# Altium PCB Peak Detector.PcbDoc
Units mm, origin at the board's own origin, x right, y up, seen from the top; angles counter-clockwise.
Board outline 80 x 50 mm, 2 copper layers (Top Layer, Bottom Layer); 59 components, 30 nets, 182 pads, 9 vias.
Unrouted connection lines stored in the file: 15.
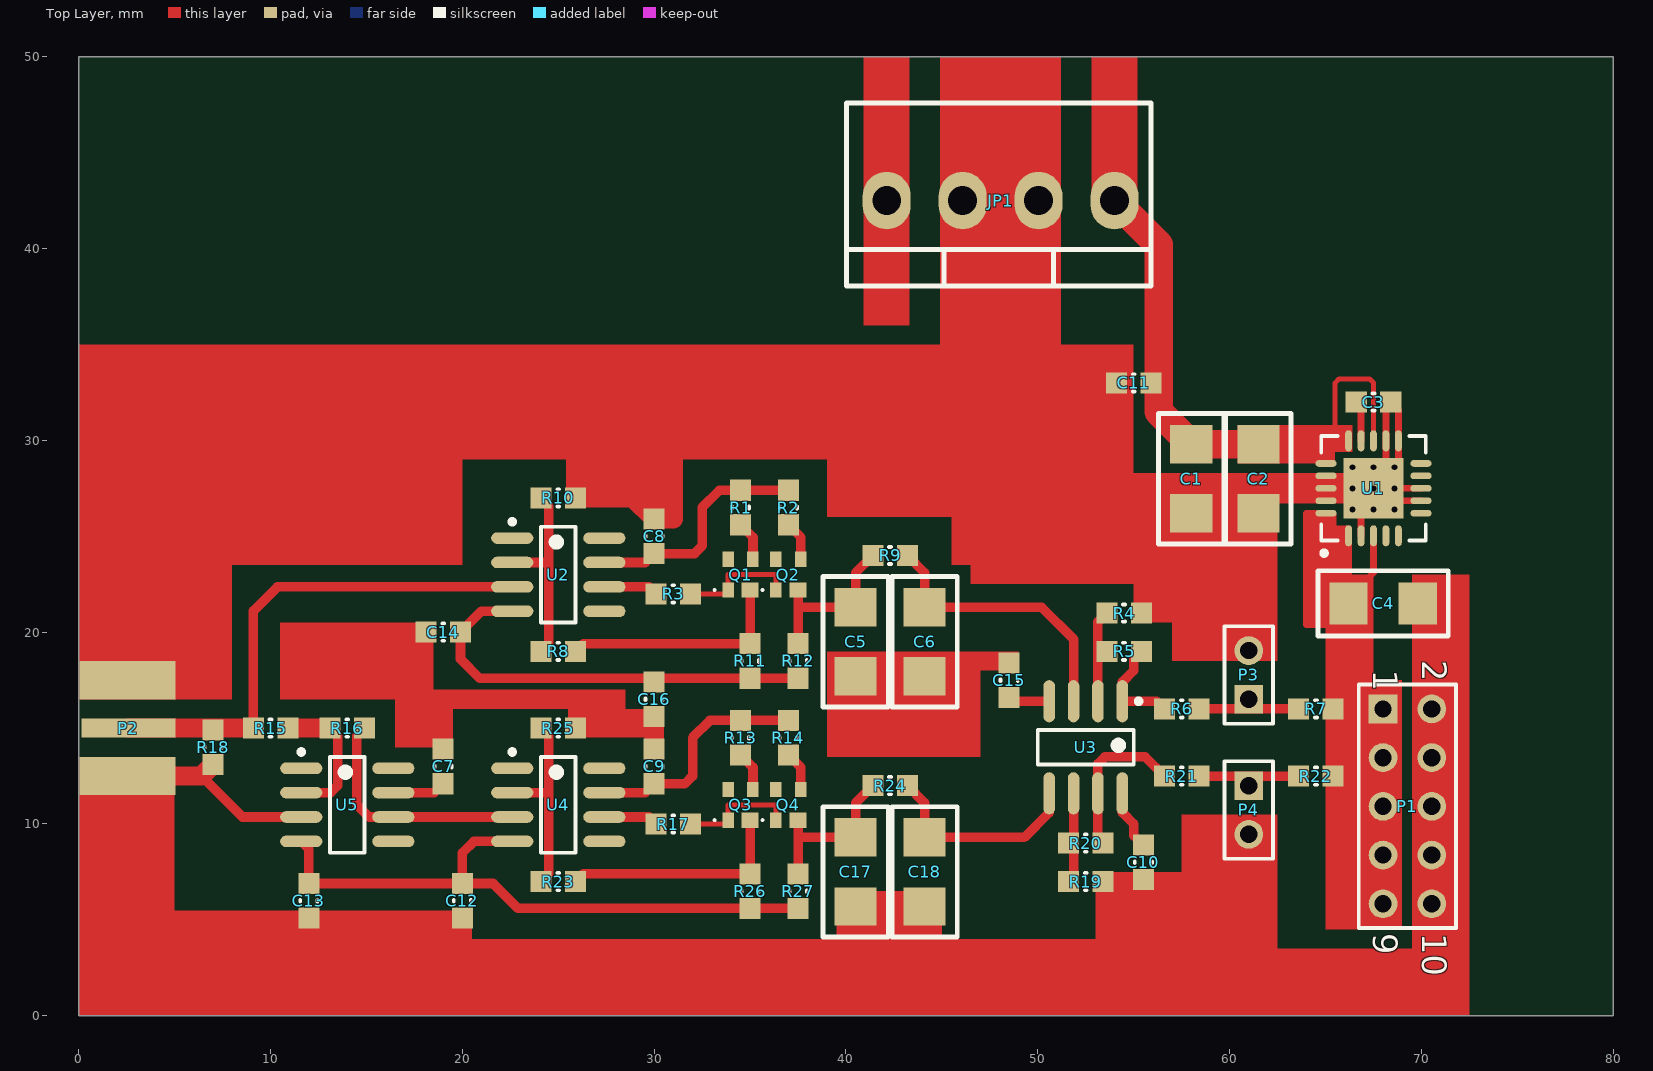
[diagram p0: Top Layer view]
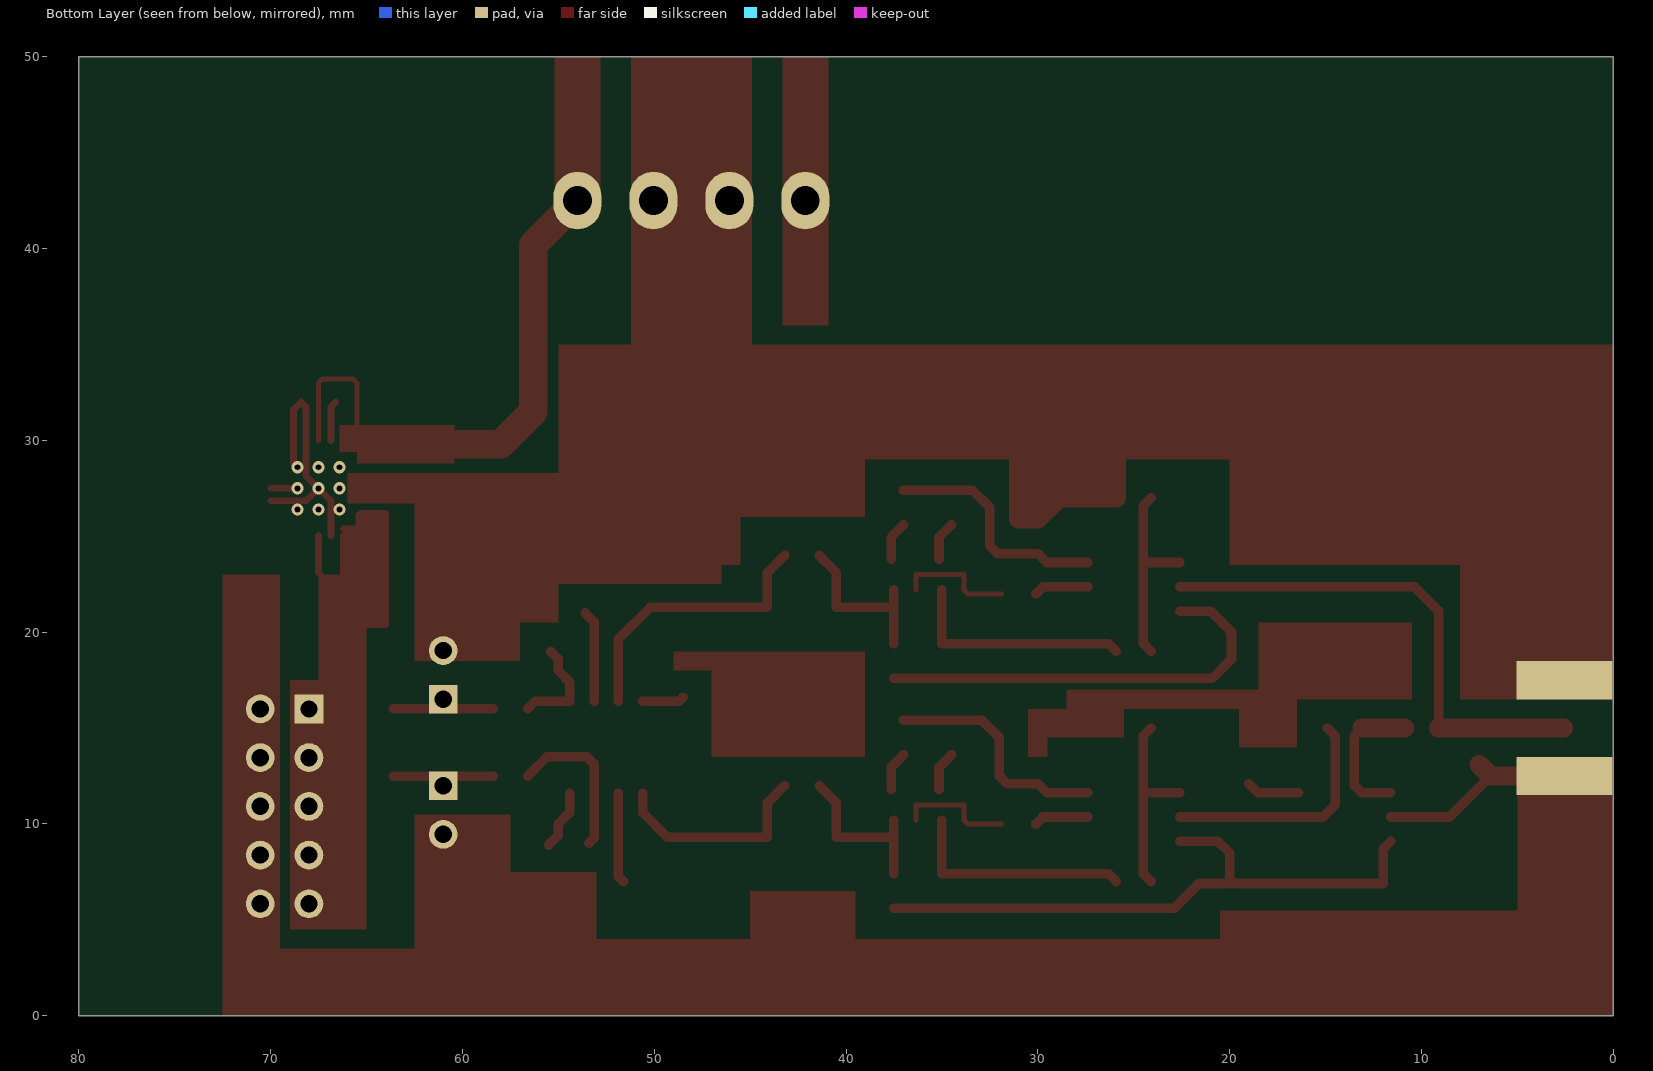
[diagram p1: Bottom Layer view, seen from below]

## Layer stack, top to bottom
Top Solder: solder mask 0.0102, Solder Resist, Dk 3.5
Top Layer: signal copper 0.0356
Dielectric 1: dielectric 0.32, FR-4, Dk 4.8
Bottom Layer: signal copper 0.0356
Bottom Solder: solder mask 0.0102, Solder Resist, Dk 3.5

## Board outline
0,0 80,0 80,50 0,50

## Design rules (kind name [scope] priority, off if disabled: settings)
Clearance [All] p1: gap=0.152
HoleSize [All] p1: absolutevalues=TRUE maxlimit=2539.975 minlimit=0.305 maxpercent=80.000 minpercent=20.000
PolygonConnect [All] p1: connectstyle=Relief reliefconductorwidth=0.254 reliefentries=4 polygonreliefangle="90 Angle" airgapwidth=0.254
RoutingVias [All] p1: holewidth=0.711 width=1.27 viastyle="Through Hole" minholewidth=0.305 minwidth=0.635 maxholewidth=711.2 maxwidth=1270
SolderMaskExpansion [All] p1: expansion=0.102
Width [All] p1: maxlimit=254 minlimit=0.254 preferedwidth=0.254
29 further rules are at their usual default settings.

## Components (designator, comment, footprint, x,y, rotation, side; value= is the part's Value field where it differs from the comment)
C1 "100uF" CAPC3225 58,28 r90 top
C2 "100uF" CAPC3225 61.5,28 r90 top
C3 "100nF" CAPC0603(1608)55_M 67.5,32 r180 top
C4 "100uF" CAPC3225 68,21.5 r180 top
C5 "100uF" CAPC3225 40.5,19.5 r90 top
C6 "100uF" CAPC3225 44.1,19.5 r90 top
C7 "100nF" CAPC0603(1608)55_M 19,13 r270 top
C8 "100nF" CAPC0603(1608)55_M 30,25 r270 top
C9 "100nF" CAPC0603(1608)55_M 30,13 r270 top
C10 "100nF" CAPC0603(1608)55_M 55.5,8 r90 top
C11 "100nF" CAPC0603(1608)55_M 55,33 r0 top
C12 "100nF" CAPC0603(1608)55_M 20,6 r90 top
C13 "100nF" CAPC0603(1608)55_M 12,6 r90 top
C14 "100nF" CAPC0603(1608)55_M 19,20 r0 top
C15 "100nF" CAPC0603(1608)55_M 48.5,17.5 r270 top
C16 "100nF" CAPC0603(1608)55_M 30,16.5 r90 top
C17 "100uF" CAPC3225 40.5,7.5 r90 top
C18 "100uF" CAPC3225 44.1,7.5 r90 top
JP1 "Header 4" 3.96-4 54,42.5 r180 top
P1 "Header 5X2" HDR2X5 68,16 r270 top
P2 "SMA" SMA-V 0,15 r0 top
P3 "Header 2" HDR1X2 61,16.5 r90 top
P4 "Header 2" HDR1X2 61,12 r270 top
Q1 "BFP420" SOT343 34.5,23 r90 top
Q2 "BFP420" SOT343 37,23 r90 top
Q3 "BFP420" SOT343 34.5,11 r90 top
Q4 "BFP420" SOT343 37,11 r90 top
R1 "4.7R" RESC0603(1608)_M 34.5,26.5 r90 top
R2 "4.7R" RESC0603(1608)_M 37,26.5 r90 top
R3 "4.7R" RESC0603(1608)_M 31,22 r180 top
R4 "1K" RESC0603(1608)_M 54.5,21 r0 top
R5 "1K" RESC0603(1608)_M 54.5,19 r180 top
R6 "1K" RESC0603(1608)_M 57.5,16 r180 top
R7 "1K" RESC0603(1608)_M 64.5,16 r180 top
R8 "1.8K" RESC0603(1608)_M 25,19 r180 top
R9 "100R" RESC0603(1608)_M 42.3,24 r180 top
R10 "NC" RESC0603(1608)_M 25,27 r0 top
R11 "820R" RESC0603(1608)_M 35,18.5 r90 top
R12 "820R" RESC0603(1608)_M 37.5,18.5 r90 top
R13 "4.7R" RESC0603(1608)_M 34.5,14.5 r90 top
R14 "4.7R" RESC0603(1608)_M 37,14.5 r90 top
R15 "560R" RESC0603(1608)_M 10,15 r180 top
R16 "560R" RESC0603(1608)_M 14,15 r180 top
R17 "4.7R" RESC0603(1608)_M 31,10 r180 top
R18 "56R" RESC0603(1608)_M 7,14 r270 top
R19 "1K" RESC0603(1608)_M 52.5,7 r0 top
R20 "1K" RESC0603(1608)_M 52.5,9 r180 top
R21 "1K" RESC0603(1608)_M 57.5,12.5 r180 top
R22 "1K" RESC0603(1608)_M 64.5,12.5 r180 top
R23 "1.8K" RESC0603(1608)_M 25,7 r180 top
R24 "100R" RESC0603(1608)_M 42.3,12 r180 top
R25 "NC" RESC0603(1608)_M 25,15 r0 top
R26 "820R" RESC0603(1608)_M 35,6.5 r90 top
R27 "820R" RESC0603(1608)_M 37.5,6.5 r90 top
U1 "TPS7A4701" QFN20 67.5,27.5 r90 top
U2 "THS3091D" SOIC8 25,23 r0 top
U3 "OPA2277" SOIC8 52.5,14 r270 top
U4 "THS3091D" SOIC8 25,11 r0 top
U5 "THS3091D" SOIC8 14,11 r0 top

## Footprints (in the part's own frame and the unit in brackets; to place one, negate y for a bottom-side part, rotate by r counter-clockwise, add the part's x,y. Pads: shape width x height; smd on the part's side, far side on the other; paste and mask are expansions set on the pad)
3.96-4 [mm]
  oval 2.5x3 hole 1.5: 1(0,0) 2(3.96,0) 3(7.92,0) 4(11.88,0)
  silkscreen extent -1.91,-5.08 13.97,4.45, body extent -1.9,-5.08 13.97,4.44, height 12
CAPC0603(1608)55_M [mm] "Chip Capacitor, Body 1.6x0.8mm, Height 0.55mm, IPC Low Density"
  rect 1.1x1.1 smd: 1(-0.9,0) 2(0.9,0)
  silkscreen extent -0.05,-0.45 0.05,0.45, body extent -0.87,-0.47 0.88,0.48, height 0.55
CAPC3225 [mm] "SMT Capacitor, 2 Leads, Body 3.5x2.8mm"
  rect 2x2.2 smd: 1(-1.8,0) 2(1.8,0)
  silkscreen extent -3.4,-1.7 3.4,1.7, body extent -1.6,-1.3 1.6,1.3, height 2.5
HDR1X2 [mm] "Connector; Header; 2 Position"
  rect 1.5x1.5 hole 0.9: 1(0,0)
  round 1.5 hole 0.9: 2(2.54,0)
  silkscreen extent -1.27,-1.27 3.81,1.27
HDR2X5 [mm] "Connector; Header; 5x2 Position"
  rect 1.5x1.5 hole 0.9: 1(0,0)
  round 1.5 hole 0.9: 2(0,2.54) 3(2.54,0) 4(2.54,2.54) 5(5.08,0) 6(5.08,2.54) 7(7.62,0) 8(7.62,2.54) 9(10.16,0) 10(10.16,2.54)
  silkscreen extent -1.27,-1.27 11.43,3.81
QFN20 [mm] "QFN, 20-Leads, Body 5.00x5.00mm, Pitch 0.65mm, Thermal Pad 3.15x3.15mm, IPC Medium Density"
  oval 1.1x0.35 smd: 1(-2.475,1.3) 2(-2.475,0.65) 3(-2.475,0) 4(-2.475,-0.65) 5(-2.475,-1.3) 11(2.475,-1.3) 12(2.475,-0.65) 13(2.475,0) 14(2.475,0.65) 15(2.475,1.3)
  oval 0.35x1.1 smd: 6(-1.3,-2.475) 7(-0.65,-2.475) 8(0,-2.475) 9(0.65,-2.475) 10(1.3,-2.475) 16(1.3,2.475) 17(0.65,2.475) 18(0,2.475) 19(-0.65,2.475) 20(-1.3,2.475)
  rect 3.15x3.15 smd: 21(0,0)
  silkscreen extent -3.5,-2.73 2.73,2.72, body extent -2.57,-2.58 2.58,2.57, height 1
RESC0603(1608)_M [mm] "Chip Resistor, Body 1.6x0.8mm, IPC Low Density"
  rect 1.1x1.1 smd: 1(-0.9,0) 2(0.9,0)
  silkscreen extent -0.05,-0.45 0.05,0.45, body extent -0.85,-0.47 0.85,0.47, height 0.6
SMA-V [mm]
  rect 4.9x1 smd: 1(2.6,0)
  rect 5x2 smd: 2(2.55,-2.5) 2(2.55,2.5)
  rect 5x2 smd far side: 2(2.55,-2.5) 2(2.55,2.5)
SOIC8 [mm] "SOIC, 8-Leads, Body 4.9x3.9mm, Pitch 1.27mm, IPC Medium Density"
  oval 2.2x0.6 smd: 1(-2.4,1.905) 2(-2.4,0.635) 3(-2.4,-0.635) 4(-2.4,-1.905) 5(2.4,-1.905) 6(2.4,-0.635) 7(2.4,0.635) 8(2.4,1.905)
  silkscreen extent -2.52,-2.5 0.9,2.88, body extent -2,-2.5 2,2.5, height 1.75
SOT343 [mm] "SOT343, 4-Leads, Body 2x1.25 mm"
  rect 0.8x0.6 smd: 1(-0.8,0.65) 3(0.8,-0.65) 4(0.8,0.65)
  rect 0.8x0.9 smd: 2(-0.8,-0.5)
  silkscreen extent -0.85,1.3 -0.75,1.4, body extent -0.63,-1 0.63,1, height 1

## Part data
C1 C2 C3 C4 C5 C6 C7 C8 C9 C10 C11 C12 C13 C14 C15 C16 C17 C18: library part CAP
JP1: "Header, 4-Pin"
P1: "Header, 5-Pin, Dual row"
P3 P4: "Header, 2-Pin"
R1 R2 R3 R4 R5 R6 R7 R8 R9 R10 R11 R12 R13 R14 R15 R16 R17 R18 R19 R20 R21 R22 R23 R24 R25 R26 R27: library part RES
U2 U4 U5: library part THS3201
U3: library part OP2

## Via types
v1: diameter 0.635, hole 0.305, Top Layer to Bottom Layer, 9 vias

## Nets (pads, with @x,y where several pads share a name; then routed paths per layer and width w, separated by ;. In a path a pad name is that pad's centre, name@x,y a point inside that pad or via, vN(x,y) a via of type N, cw(c..) or ccw(c..) an arc to the next point about the centre after c; other vN are vias at no path point)
+3.3V: C4.2 P1.1 P1.3 P1.5 P1.7 P1.9 R7.1 R22.1 U1.1 U1.3 U1.20 | length 15.7
  Top Layer w0.35: 65.1,20.4 64,20.4 64,26.2 U1.20 65.3,26.2 65.4,26.1 65.4,25.4 U1.1@66.2,25.4 ; C4.2 U1.1 ; 67.2,22.8 67.5,23.1 U1.3
+12V: C1.2 C2.2 C7.2 C8.2 C9.2 C10.2 C11.2 JP1.1 R1.2 R2.2 R13.2 R14.2 U1.13 U1.15 U1.16 U2.7 U3.8 U4.7 U5.7 | length 56.4
  Top Layer w0.254: 65.5,30.3 65.5,33 65.7,33.2 67.3,33.2 67.5,33 U1.13
  Top Layer w0.5: U5.7 18.535,11.635 C7.2 ; U4.7 29.535,11.635 C9.2 31.6,12.1 32,12.5 32,14.5 32.9,15.4 R13.2 R14.2 ; U2.7 29.535,23.635 C8.2 32.1,24.1 32.5,24.5 32.5,26.5 33.4,27.4 R1.2 R2.2 ; U3.8 54.405,10.595 55,10 55,9.4 C10.2
  Top Layer w1.5: JP1.1 56.3,40.2 56.3,31.5 C1.2 C2.2
-12V: C12.2 C13.2 C14.2 C15.2 C16.2 R11.1 R12.1 R26.1 R27.1 U2.4 U3.4 U4.4 U5.4 | length 57.3
  Top Layer w0.5: U5.4 12,8.695 C13.2 C12.2@19.7,6.9 ; U4.4 20.595,9.095 20,8.5 C12.2 21.6,6.9 22.9,5.6 R26.1 R27.1 ; U2.4 20.995,21.095 C14.2 19.9,18.6 20.9,17.6 R11.1 R12.1 ; C15.2 48.7,16.4 U3.4
GND: C1.1 C2.1 C3.1 C4.1 C5.1 C6.1 C7.1 C8.1 C9.1 C10.1 C11.1 C12.1 C13.1 C14.1 C15.1 C16.1 C17.1 C18.1 JP1.2 JP1.3 P1.2 P1.4 P1.6 P1.8 P1.10 P2.2 P3.2 P4.2 R4.2 R10.2 R18.2 R19.2 R25.2 U1.2 U1.7 U1.8 U1.11 U1.12 U1.17 U1.18 U1.19 U1.21 U5.3 | length 40.6
  Top Layer w0.35: U1.2 66.85,26.85 v1(67.5,27.5) ; v1(68.6,27.5) U1.8 ; v1(68.6,28.6) 68.8,28.8 U1.11 68.8,31.6 C3.1 68.15,31.75 U1.12 68.15,28.15 v1(67.5,27.5) ; U1.7 68.15,26.85 v1(67.5,27.5)
  Top Layer w0.5: 6.4,12.5 8.535,10.365 U5.3
  Top Layer w1: P2.2@2.55,12.5 6.4,12.5 R18.2 ; 25.9,29.6 R10.2 28.9,27 ; C8.1@30.2,26.1 30.2,27 ; 30.9,27 30.2,27 ; 31,29.3 31,25.9 C8.1 28.9,27 ; 28.9,27 30.2,27
  other v1: 66.4,26.4 67.5,26.4 68.6,26.4 66.4,27.5 66.4,28.6 67.5,28.6
NetC3_2: C3.2 U1.14 | length 2.1
  Top Layer w0.35: C3.2 66.85,31.75 U1.14
NetC5_2: C5.2 Q2.2 Q2.4 R9.2 R12.2 | length 8.9
  Top Layer w0.5: R12.2 37.5,21.3 ; Q2.2 37.5,21.3 ; R9.2 40.5,23.1 C5.2 37.5,21.3
NetC6_2: C6.2 R9.1 U3.3 | length 14.8
  Top Layer w0.5: R9.1 44.1,23.1 C6.2 50.2,21.3 51.865,19.635 U3.3
NetC17_2: C17.2 Q4.2 Q4.4 R24.2 R27.2 | length 8.9
  Top Layer w0.5: R27.2 37.5,9.3 ; Q4.2 37.5,9.3 ; R24.2 40.5,11.1 C17.2 37.5,9.3
NetC18_2: C18.2 R24.1 U3.5 | length 11.1
  Top Layer w0.5: R24.1 44.1,11.1 C18.2 49.3,9.3 50.595,10.595 U3.5
NetP2_1: P2.1 R15.2 R18.1 U2.3 | length 26.6
  Top Layer w0.508: R15.2 9.1,21.1 10.365,22.365 U2.3
  Top Layer w1: P2.1 R15.2
NetP3_1: P3.1 R6.1 R7.2 | length 5.2
  Top Layer w0.5: R6.1 R7.2
NetP4_1: P4.1 R21.1 R22.2 | length 5.2
  Top Layer w0.5: R21.1 R22.2
NetQ1_1: Q1.1 Q2.1 R3.1 | length 6.1
  Top Layer w0.254: R3.1 33.65,22 Q1.1 33.85,23 36.35,23 Q2.1
NetQ1_2: Q1.2 Q1.4 R8.1 R11.2 | length 12.1
  Top Layer w0.5: R8.1 26.3,19.4 R11.2 Q1.2
NetQ1_3: Q1.3 R1.1 | length 2.1
  Top Layer w0.5: R1.1 35.15,24.95 Q1.3
NetQ2_3: Q2.3 R2.1 | length 2.1
  Top Layer w0.5: R2.1 37.65,24.95 Q2.3
NetQ3_1: Q3.1 Q4.1 R17.1 | length 6.1
  Top Layer w0.254: R17.1 33.65,10 Q3.1 33.85,11 36.35,11 Q4.1
NetQ3_2: Q3.2 Q3.4 R23.1 R26.2 | length 12.1
  Top Layer w0.5: R23.1 26.3,7.4 R26.2 Q3.2
NetQ3_3: Q3.3 R13.1 | length 2.1
  Top Layer w0.5: R13.1 35.15,12.95 Q3.3
NetQ4_3: Q4.3 R14.1 | length 2.1
  Top Layer w0.5: R14.1 37.65,12.95 Q4.3
NetR3_2: R3.2 U2.6 | length 2.9
  Top Layer w0.508: U2.6 29.735,22.365 R3.2
NetR4_1: R4.1 R5.2 U3.2 | length 4.8
  Top Layer w0.5: U3.2 53.135,20.535 R4.1
NetR5_1: R5.1 R6.2 U3.1 | length 5.4
  Top Layer w0.5: R5.1 55,18.6 55,18 54.405,17.405 U3.1 56.2,16.4 R6.2
NetR8_2: R8.2 R10.1 U2.2 | length 10.2
  Top Layer w0.5: U2.2 24.465,23.635 24.5,23.6 ; R8.2 24.5,19.4 24.5,23.6 ; R10.1 24.5,26.6 24.5,23.6
NetR15_1: R15.1 R16.2 U5.2 | length 7.4
  Top Layer w0.5: U5.2 13.135,11.635 13.5,12 13.5,14.6 R16.2
  Top Layer w1: R15.1 R16.2
NetR16_1: R16.1 U4.3 U5.6 | length 12.5
  Top Layer w0.5: R16.1 14.5,14.6 14.5,11 15.135,10.365 U5.6 U4.3
NetR17_2: R17.2 U4.6 | length 2.9
  Top Layer w0.5: U4.6 29.735,10.365 R17.2
NetR19_1: R19.1 R20.2 U3.6 | length 4.7
  Top Layer w0.5: R19.1 51.865,7.265 U3.6
NetR20_1: R20.1 R21.2 U3.7 | length 8.3
  Top Layer w0.5: R20.1 53.135,9.265 U3.7 53.135,13.135 53.5,13.5 55.6,13.5 R21.2
NetR23_2: R23.2 R25.1 U4.2 | length 10.3
  Top Layer w0.5: U4.2 24.365,11.635 24.5,11.5 ; R23.2 24.5,7.4 24.5,11.5 ; R25.1 24.5,14.6 24.5,11.5
pads on no net: JP1.4 U1.4 U1.5 U1.6 U1.9 U1.10 U2.1 U2.5 U2.8 U4.1 U4.5 U4.8 U5.1 U5.5 U5.8

## Other copper
Top Layer:
  rectangle net GND: 0,16.5 5,27.5
  rectangle net GND: 0,23.5 20,29
  rectangle net GND: 0,29 50,35
  rectangle net GND: 0,0 5,13.5
  rectangle net GND: 0,0 20.5,5.5
  rectangle net GND: 20.5,0 62.5,4
  rectangle net GND: 39.5,3.5 45,6.5
  rectangle net GND: 53,3.5 56,7.5
  rectangle net GND: 10.5,16.5 18.5,20.5
  rectangle net GND: 5,16.5 8,23.5
  rectangle net GND: 16.5,14 19.5,16.5
  rectangle net GND: 25.5,14.5 30.5,16
  rectangle net GND: 29.5,13.5 30.5,14.5
  rectangle net GND: 18.5,16 28.5,17
  rectangle net GND: 39,18 49,19
  rectangle net GND: 39,13.5 47,19
  rectangle net GND: 57.5,4 62.5,10.5
  rectangle net GND: 55.5,4 57.5,7.5
  rectangle net GND: 57,18.5 62.5,27.5
  rectangle net +3.3V: 65,4.5 67.5,23
  rectangle net +3.3V: 65,4.5 69,17.5
  rectangle net GND: 55,20.5 57,27.5
  rectangle net GND: 39,26 55,35
  rectangle net GND: 45.5,23.5 55,26
  rectangle net GND: 46.5,22.5 55,23.5
  rectangle net GND: 69.5,0 72.5,23
  rectangle net GND: 62.5,0 69.5,3.5
  rectangle net GND: 55,26.7 66,28.3
  rectangle net +12V: 60.4,28.8 65.5,30.8
  rectangle net +12V: 65.3,29.4 66.4,30.8
  rectangle net GND: 25.9,27 31.1,29.8
  rectangle net +12V: 52.8,42.5 55.2,50
  rectangle net GND: 44.9,33.9 51.2,50
  rectangle: 40.9,36 43.3,50
  rectangle net +3.3V: 64,22.6 65.4,26.1
  rectangle net +3.3V: 64.8,21.8 66.2,25.4
  rectangle net +3.3V: 64,20.4 65.6,22.8

## Silkscreen, mask and mechanical layers (free items; w line width, h text height)
Mechanical 1:
  the board outline again, w0.254

## Text inside footprints (layer, text, board x,y; h text height)
P1: Top Overlay "2" at 70.032,18.54 h1.27 r270; Top Overlay "1" at 67.492,18.032 h1.27 r270; Top Overlay "9" at 67.492,4.316 h1.27 r270; Top Overlay "10" at 70.032,4.316 h1.27 r270